# EAGLE board Project_Milestone04v2.0.0 (EAGLE 9.2.0)
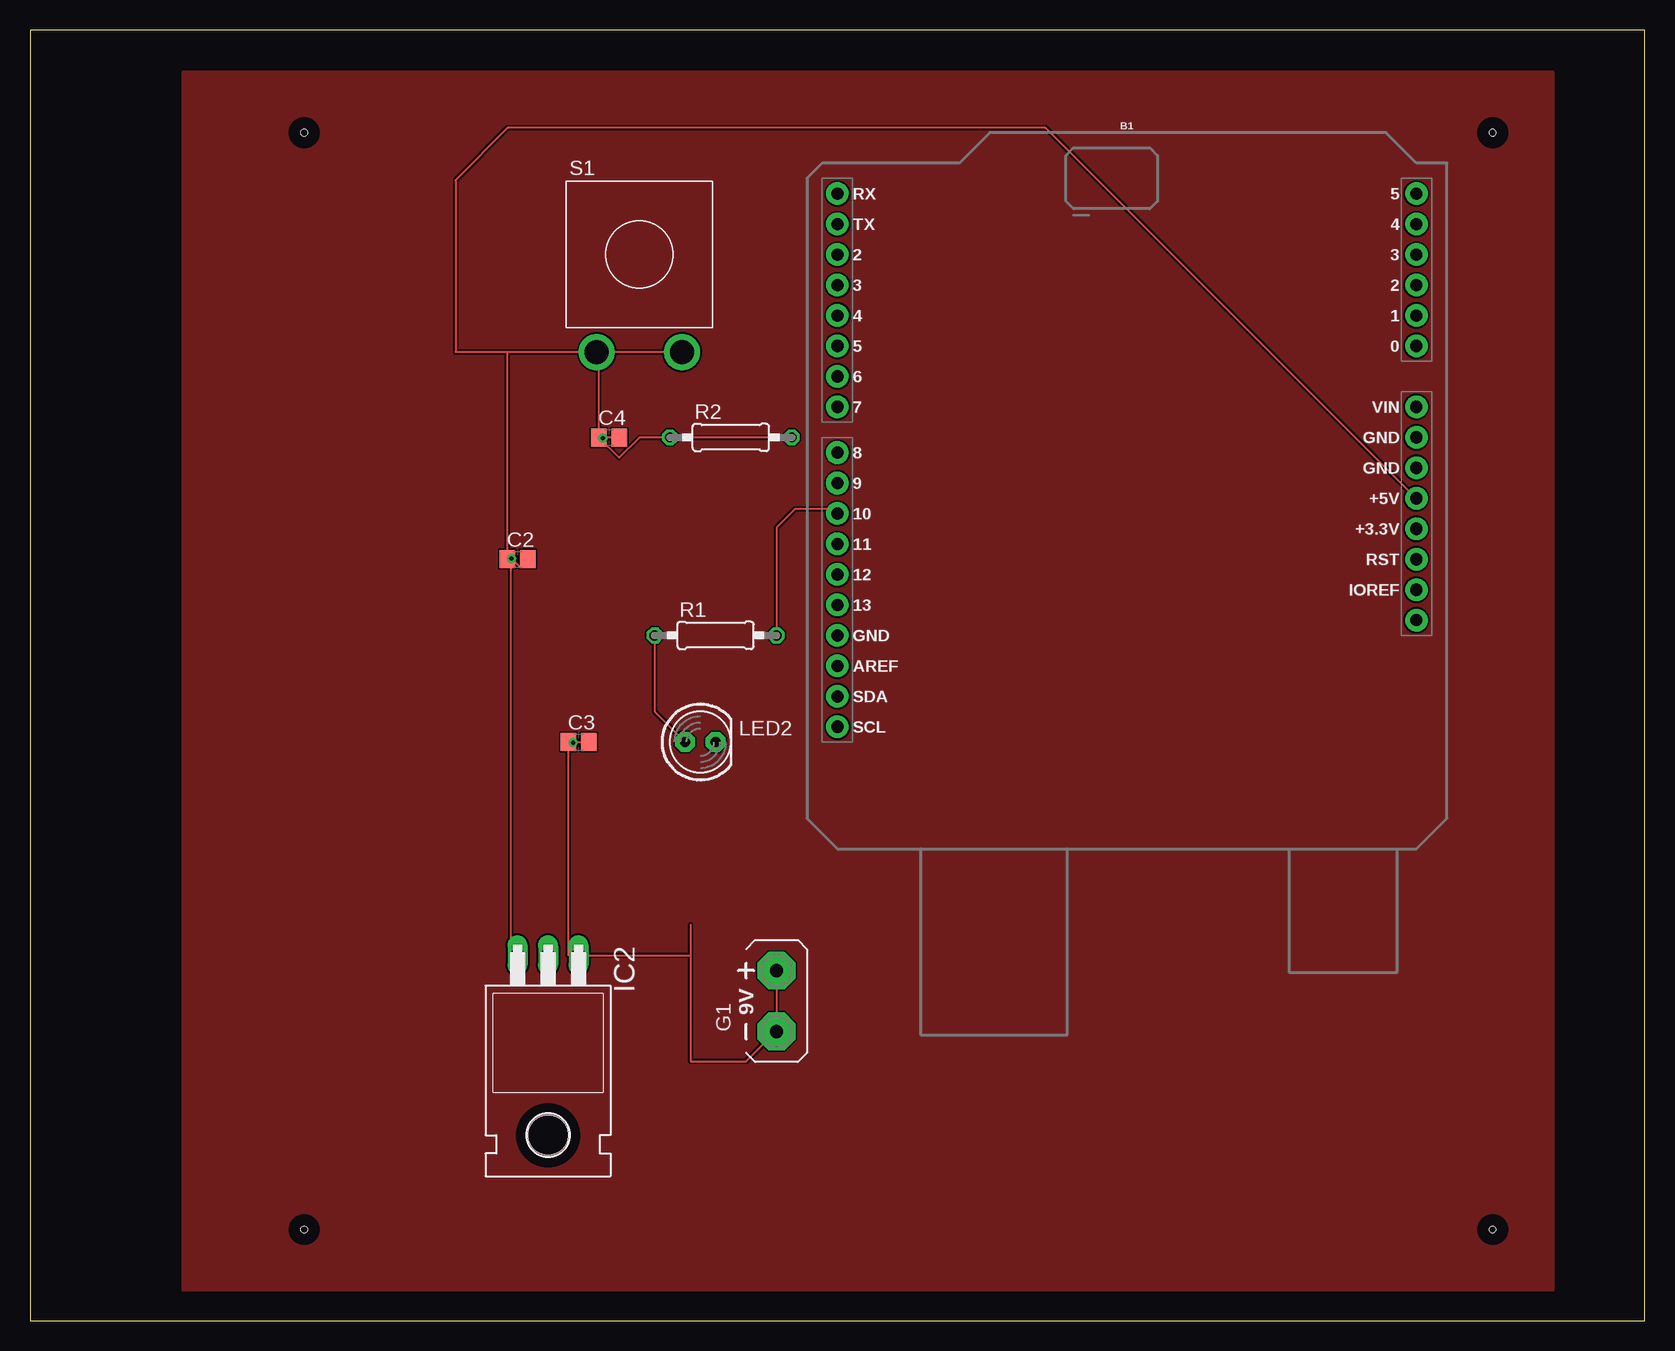
[diagram p0: board, top side]
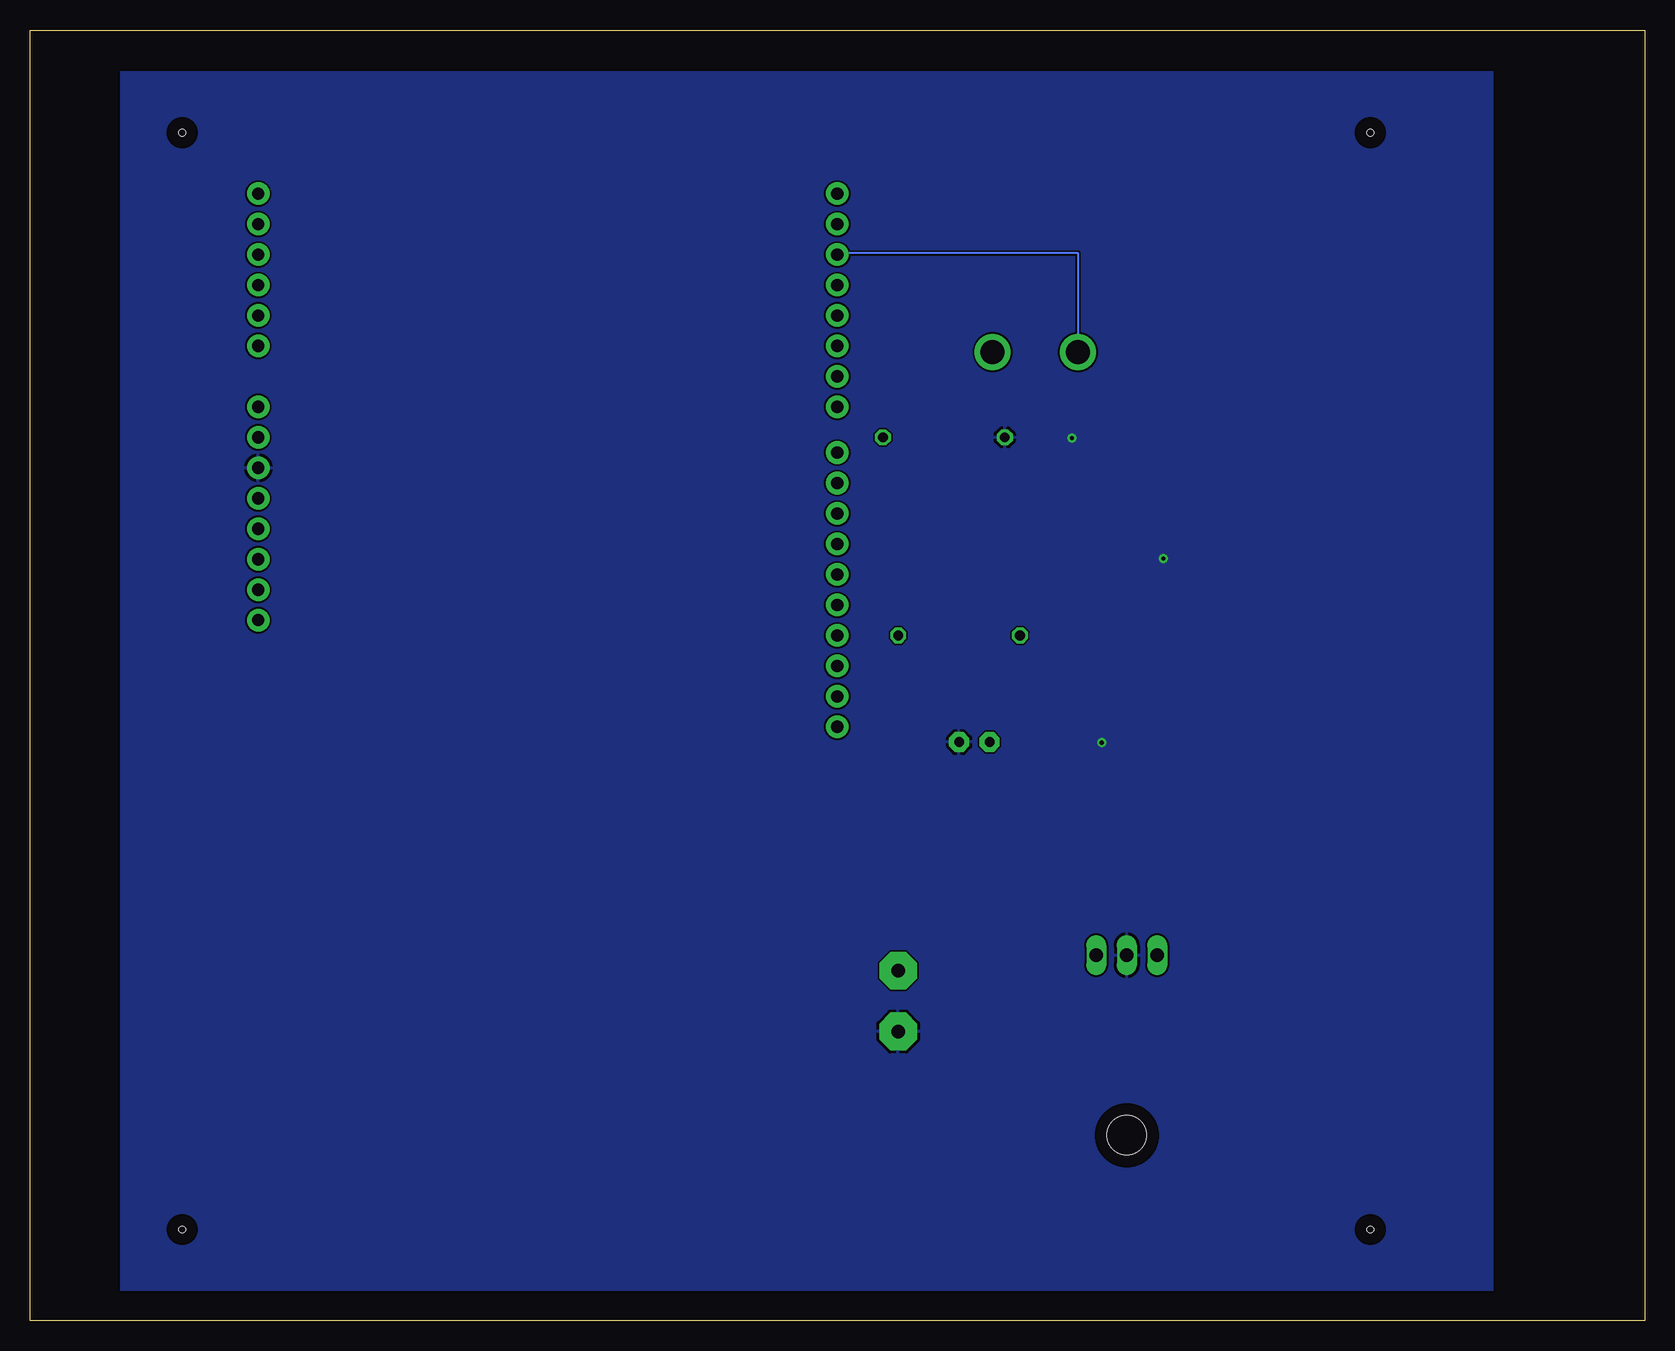
[diagram p1: board, bottom side, seen from below]

Size 134.6 x 107.62 mm. Coordinates in mm from the lower left corner, seen from the top.
Outline: 0,0 134.6,0 134.6,107.62 0,107.62 0,0
Copper layers (1*16): Top 0.035mm / dielectric 1.5mm / Bottom 0.035mm
Design rules "default": minimum track width 6mil, minimum drill 0.35mm, track to track 6mil, track to pad 6mil, pad to pad 6mil, via to via 6mil, smd to smd 6mil, copper to edge 40mil, drill to drill 6mil, minimum pad ring 10mil, minimum via ring 8mil, stop-mask expansion 4mil, vias tented up to drill 0mil, thermal gap 10mil
Holes 0.55 mm at 22.86,99.06 22.86,7.62 121.92,7.62 121.92,99.06

## Footprints (pad centres in the part's own frame; a part is rotated, then mirrored left to right if it is on the bottom)
UNO_R3_SHIELD = drill 1.016 pad 1.88: 3.3V 24.13,-2.54; 5V 24.13,0; A0 24.13,12.7; A1 24.13,15.24; A2 24.13,17.78; A3 24.13,20.32; A4 24.13,22.86; A5 24.13,25.4; AREF -24.13,-13.97; D2 -24.13,20.32; D3 -24.13,17.78; D4 -24.13,15.24; D5 -24.13,12.7; D6 -24.13,10.16; D7 -24.13,7.62; D8 -24.13,3.81; D9 -24.13,1.27; D10 -24.13,-1.27; D11 -24.13,-3.81; D12 -24.13,-6.35; D13 -24.13,-8.89; GND@0 24.13,2.54; GND@1 24.13,5.08; GND@2 -24.13,-11.43; IOREF 24.13,-7.62; NC 24.13,-10.16; RES 24.13,-5.08; RX -24.13,25.4; SCL -24.13,-19.05; SDA -24.13,-16.51; TX -24.13,22.86; VIN 24.13,7.62
C0805 = smd 1.3 x 1.5: 1 -0.85,0; 2 0.85,0
AB9V = drill 1.118 pad 3.15 octagon: + 0,2.54; - 0,-2.54
TO220H = drill 1.118 long: 1 -2.54,-10.16; 2 0,-10.16; 3 2.54,-10.16 | hole 3.302: 0,4.826
LED5MM = drill 0.813 pad 1.676 octagon: A -1.27,0; K 1.27,0
0207/10 = drill 0.813 octagon: 1 -5.08,0; 2 5.08,0
JUDCOSPST = drill 2: P 3.556,-8.128; T -3.556,-8.128

## Placement (x,y rotation side)
B1  ARDUINO_UNO_R3_SHIELDBASIC  [UNO_R3_SHIELD]  91.44,68.58 0 top
C2  10F  [C0805]  40.64,63.5 0 top
C3  10F  [C0805]  45.72,48.26 0 top
C4  10F  [C0805]  48.26,73.66 0 top
G1  AB9V  [AB9V]  62.23,26.67 0 top
IC2  7805T  [TO220H]  43.18,20.32 180 top
LED2  [LED5MM]  55.88,48.26 0 top
R1  100k  [0207/10]  57.15,57.15 0 top
R2  100k  [0207/10]  58.42,73.66 0 top
S1  SPST  [JUDCOSPST]  50.8,88.9 0 top

## Library data of the parts
B1 = SparkFun-Boards
C2-C4 IC2 LED2 S1 = adafruit
G1 = battery
R1 R2 = rcl; SPICEPREFIX: R

## Nets
GND: B1.GND@0 C2.2 C3.2 C4.2 G1.- IC2.2 LED2.K R2.1
N$1: C3.1 G1.+ IC2.1
N$2: B1.D10 R1.2
N$4: LED2.A R1.1
N$7: B1.D2 C4.1 R2.2 S1.T
VCC: B1.5V C2.1 IC2.3 S1.P

## Tracks (layer width: path | path; a pad name or v marks a point on that pad's centre or on a via)
GND  (via drill 0.35)
  Top 0.152: C2.2 40.84,62.85 v40.13,63.55 | C3.2 46.52,48.21 v45.26,48.21 | C4.2 47.75,73.66 v47.75,73.61
  pour Bottom: 12.7,104.14 12.7,2.54 127,2.54 127,104.14
N$1
  Top 0.152: 55.07,33.02 55.07,30.48 | 55.07,30.48 55.07,21.64 59.69,21.64 62.23,24.18 G1.+ | C3.1 44.87,30.48 IC2.1 55.07,30.48
N$2
  Top 0.152: R1.2 62.23,66.14 63.75,67.67 66.9,67.67 67.21,67.36 B1.D10
N$4
  Top 0.152: R1.1 52.07,50.8 LED2.A
N$7
  Top 0.152: S1.T 47.41,80.61 C4.1 49.1,71.97 50.8,73.66 R2.2
  Bottom 0.152: B1.D2 67.21,89 47.24,89 S1.T
TOP
  pour Top: 12.7,104.14 12.7,2.54 127,2.54 127,104.14
VCC
  Top 0.152: IC2.3 40.08,30.48 40.08,63.41 C2.1 39.79,80.77 S1.P 35.46,80.77 35.46,95.1 39.83,99.47 84.63,99.47 115.52,68.58 B1.5V